# Altium PCB DPT2.0.PcbDoc (part 2 of 2)
Units mm, origin at the board's own origin, x right, y up, seen from the top; angles counter-clockwise.
Board outline 109.22 x 132.08 mm, 4 copper layers (Top Layer, Layer 1, Layer 2, Bottom Layer), stack 1.491 mm thick; 260 components, 74 nets, 572 pads, 330 vias.
Unrouted connection lines stored in the file: 54.
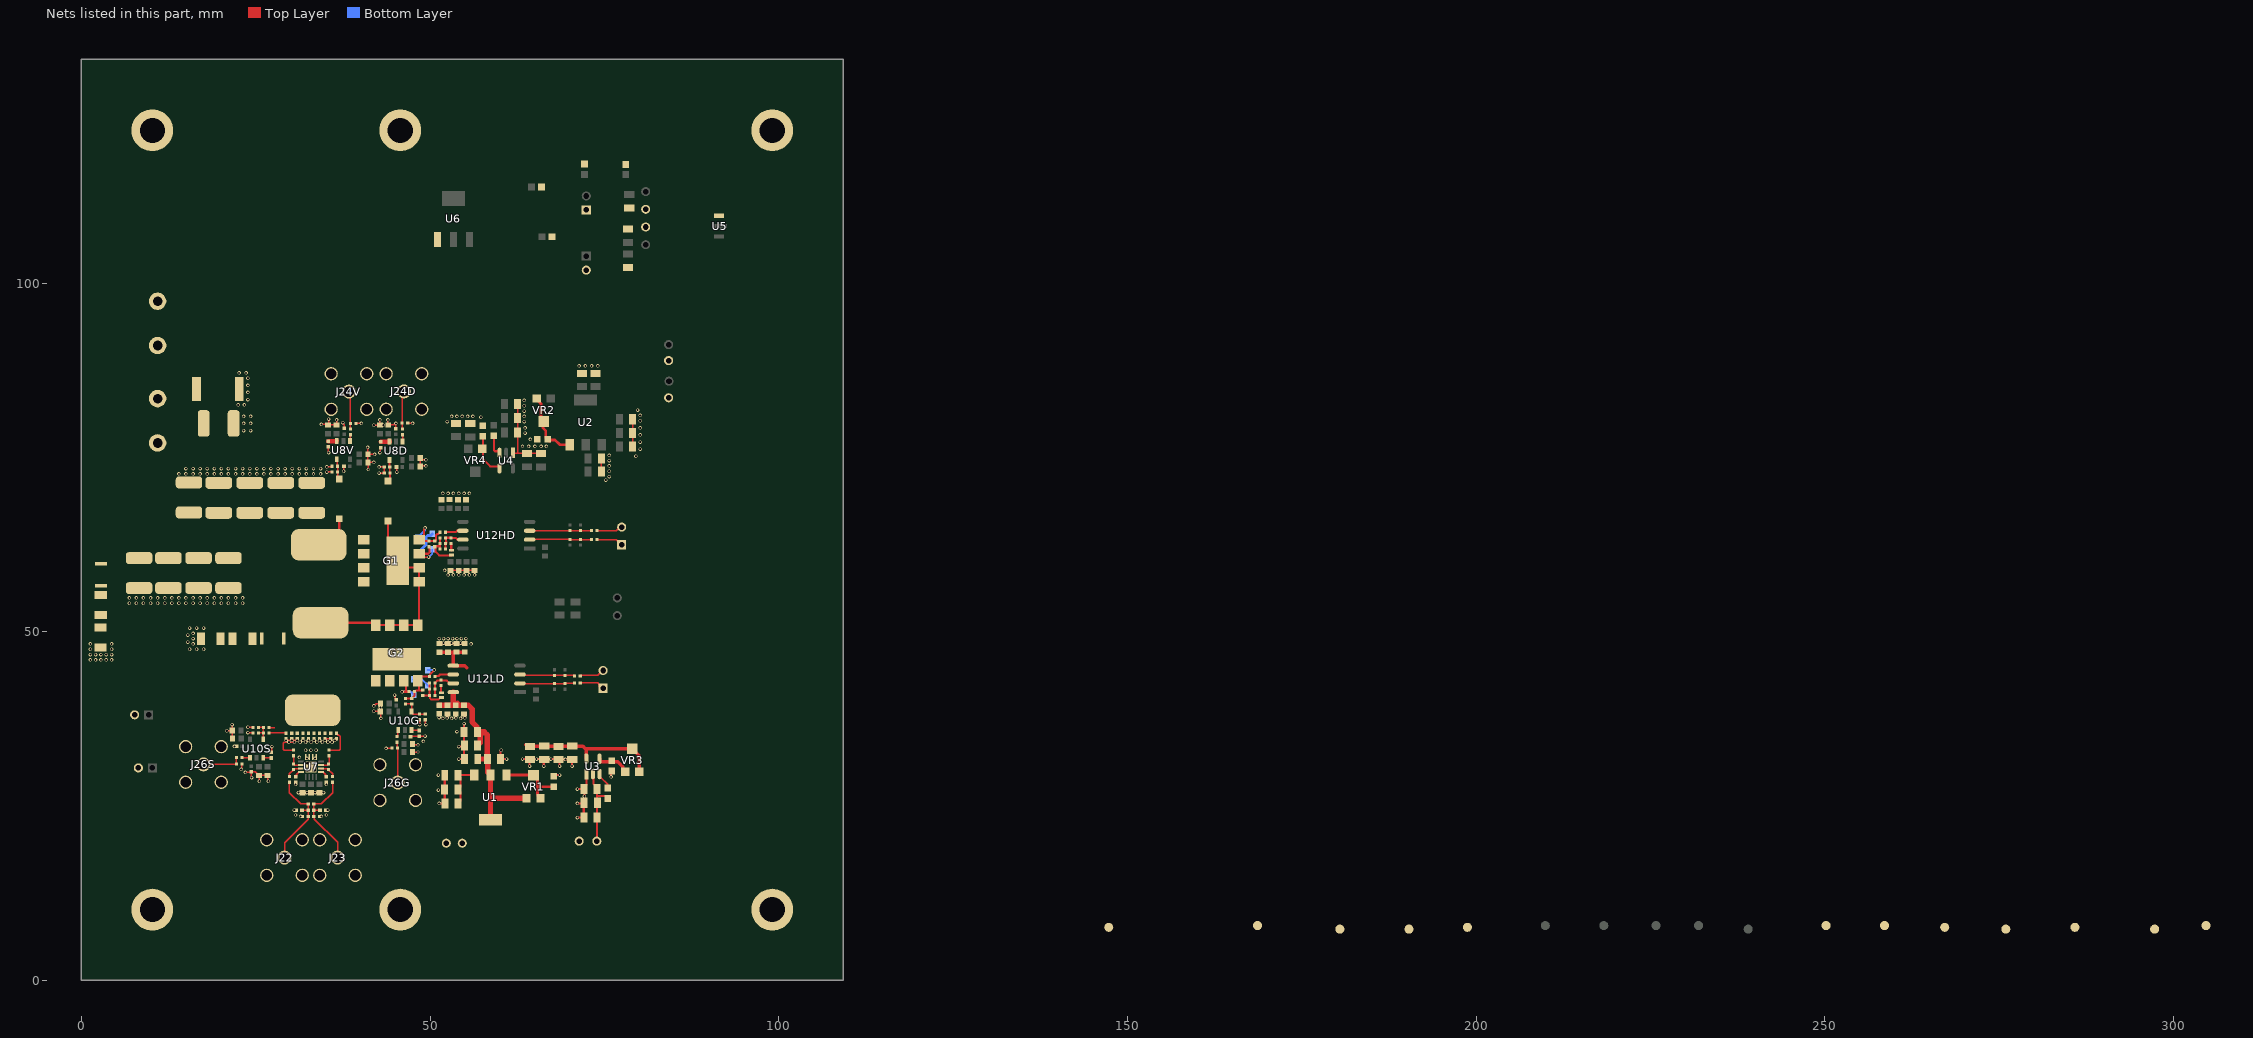
[diagram p4: the nets of this part, all layers, seen from the top]

## Via types
v1: diameter 0.5, hole 0.3, Top Layer to Bottom Layer, 330 vias

## Nets (pads, with @x,y where several pads share a name; then routed paths per layer and width w, separated by ;. In a path a pad name is that pad's centre, name@x,y a point inside that pad or via, vN(x,y) a via of type N, cw(c..) or ccw(c..) an arc to the next point about the centre after c; other vN are vias at no path point) (continued)
H_SS: C13.2 C14.2 C17.2 C18.2 C30.2 C31.2 C32.2 C33.2 C37.2 C38.2 C39.2 C40.2 C44.2 C50.1 C96HD.1 C97HD.1 C98HD.1 C99HD.1 C101HD.2 C102HD.2 C103HD.2 C104HD.2 D2HD.1 G1.3 H_SS.1 J12.1 J16.1 R7.1 R11.1 R68.1 U4.1 | length 26.4
  Top Layer w0.185: G1.3@48.425,61.198 48.917,60.706 v1(49.784,60.706) ; C96HD.1@52.937,58.796 52.941,58.8 54.091,58.8 C97HD.1@54.102,58.811 54.113,58.8 C98HD.1@55.228,58.8 56.374,58.8 C99HD.1@56.384,58.791 ; U4.1@61.859,75.649 61.933,75.575 62.56,75.575 ; C31.2@62.545,82.677 C30.2@62.545,80.645 C50.1@62.545,78.613 C50.1@62.545,78.388 ; C50.1@62.953,77.981 C50.1@62.545,78.388 ; C33.2@65.873,75.56 65.858,75.575 62.56,75.575 ; C18.2@74.546,72.977 C17.2@74.546,74.875 ; C44.2@79.055,76.556 C13.2@79.055,80.493 ; C50.1@62.545,78.388 62.545,75.59 62.56,75.575
  Top Layer w0.3: G1.3@48.425,61.198 49.717,61.198 49.936,61.417 49.936,61.666 49.928,61.674 49.928,62.132 R11.1@49.853,62.207
  Bottom Layer w0.185: v1(49.784,60.706) 50.292,61.214 50.292,61.849 D2HD.1@50.298,61.855
  other v1: 52.578,58.166 53.34,58.166 54.102,58.166 54.864,58.166 55.626,58.166 56.388,58.166 52.07,58.801 51.816,69.85 52.578,69.85 53.34,69.85 54.102,69.85 54.864,69.85 55.626,69.85 75.184,71.755 75.692,72.263 75.692,73.025 75.692,73.787 75.692,74.549 79.502,75.184 75.692,75.311 80.137,76.2 63.246,76.581 64.135,76.581 65.024,76.581 65.913,76.581 66.675,76.581 80.137,77.216 64.389,77.597 80.137,78.232 63.627,78.486 63.627,79.248 80.137,79.248 52.451,80.137 63.5,80.137 80.137,80.264 57.277,80.772 53.086,80.899 53.848,80.899 54.61,80.899 55.372,80.899 56.134,80.899 63.5,80.899 80.137,81.026 63.5,81.661 79.756,81.788 63.5,82.423 63.5,83.185 71.374,88.138 72.263,88.138 73.152,88.138 74.041,88.138
L_+V: "L +V.1" C15.1 C16.1 C22.1 C23.1 C96LD.2 C97LD.2 C98LD.2 C99LD.2 U1.2 U1.4 U12LD.8 VR1.1 | length 33.1
  Top Layer w0.762: C96LD.2@51.308,39.487 51.311,39.484 52.509,39.484 C97LD.2@52.512,39.481 52.514,39.484 C99LD.2@53.678,39.484 ; U12LD.8@53.325,41.34 53.325,39.669 53.492,39.669 C99LD.2@53.678,39.484 ; C99LD.2@53.934,39.735 53.683,39.484 C99LD.2@53.678,39.484 ; C22.1@56.783,35.656 56.664,35.775 56.664,36.427 56.027,37.064 56.027,38.945 55.5,39.471 54.8,39.471 54.793,39.478 53.684,39.478 C99LD.2@53.678,39.484 ; C15.1@56.805,33.706 57.18,34.081 57.18,35.194 57.494,35.508 57.494,35.656 57.746,35.656 58.207,35.195 C23.1@58.207,31.775 ; C16.1@56.83,31.75 56.855,31.775 C23.1@58.207,31.775 ; U1.4@58.649,23.052 58.649,26.196 ; VR1.1@63.82,26.15 58.695,26.15 58.649,26.196 ; C23.1@58.207,31.775 58.256,31.726 58.256,29.845 U1.2@58.649,29.452 58.649,26.196
L_+VIN: C11.1 C12.1 C43.1 J8.1 U1.3 | length 7
  Top Layer w0.25: C43.1@54.013,25.4 54.369,25.756 54.369,27.025 C11.1@53.994,27.4 54.369,27.775 54.369,29.065 C12.1@53.995,29.439 54.009,29.452 U1.3@56.349,29.452
L_-V: "L -V.1" C24.1 C25.1 C28.1 C29.1 C101LD.1 C102LD.1 C103LD.1 C104LD.1 U3.5 U12LD.5 VR3.2 VR3.3 | length 28.3
  Top Layer w0.5: C104LD.1@51.359,47.076 51.366,47.083 53.328,47.083 ; C102LD.1@53.359,47.083 54.957,47.083 C101LD.1@54.964,47.091 ; C102LD.1@53.359,47.114 53.328,47.083 ; 55.245,44.857 54.952,45.15 U12LD.5@53.325,45.15 53.325,47.08 53.328,47.083 ; C25.1@63.74,33.824 64.088,33.824 C25.1@64.338,33.574 64.351,33.587 66.358,33.587 C24.1@66.37,33.599 66.375,33.594 68.407,33.594 C28.1@68.412,33.589 68.418,33.595 70.372,33.595 C29.1@70.378,33.6 70.391,33.587 71.916,33.587 72.253,33.25 ; U3.5@72.398,31.811 72.398,33.105 72.253,33.25 ; VR3.2@79.994,29.95 79.994,32.25 VR3.3@78.994,33.25 72.253,33.25
L_-VIN: C26.1 C27.1 C49.2 J19.1 R13.1 U3.2 | length 11.3
  Top Layer w0.25: U3.2@73.416,29.42 73.411,29.415 73.411,28.995 73.416,28.99 73.416,28.204 73.563,28.057 73.57,28.057 73.945,27.682 73.945,26.448 75.098,26.448 R13.1@75.448,26.098 ; J19.1@73.909,19.985 73.933,20.01 C26.1@73.933,23.378 73.933,25.491 73.933,26.448
L_Gate: D3LD.1 FB1LD.2 G2.4 L_Gate.1 R21.2 R57G.2 R58G.2 R63LD.2 | length 8.9
  Top Layer w0.3: R58G.2@46.493,40.453 46.496,40.456 47.358,40.456 R57G.2@47.36,40.458 47.778,40.876 R21.2@47.778,41.466 47.853,41.541 47.978,41.541 48.029,41.592 48.556,41.592 48.564,41.6 48.871,41.6 FB1LD.2@48.946,41.675 ; 48.413,41.652 48.413,42.814 G2.4@48.212,43.015 48.212,43.055 48.737,43.58 R63LD.2@49.887,43.58 49.962,43.655 49.962,43.882 50.59,44.509 v1(50.59,44.544)
  Bottom Layer w0.3: D3LD.1@49.632,44.509 49.667,44.544 v1(50.59,44.544)
L_SS: C11.2 C12.2 C15.2 C16.2 C22.2 C23.2 C24.2 C25.2 C26.2 C27.2 C28.2 C29.2 C43.2 C49.1 C96LD.1 C97LD.1 C98LD.1 C99LD.1 C101LD.2 C102LD.2 C103LD.2 C104LD.2 D2LD.1 G2.3 J11.1 J15.1 L_SS.1 R6.1 R14.1 R21.1 U3.1 | length 48.5
  Top Layer w0.3: v1(45.974,41.402) 46.914,41.402 R21.1@46.978,41.466 ; G2.3@46.212,43.015 46.529,42.698 46.529,41.466 ; v1@51.289,37.674 v1(51.273,37.69) 51.291,37.707 C96LD.1@51.291,38.22 ; v1(51.308,25.4) C43.2@52.113,25.4 52.095,25.417 C12.2@52.095,29.439 ; C104LD.2@51.359,48.326 51.366,48.333 54.957,48.333 C101LD.2@54.964,48.341 ; v1(52.426,37.658) 52.464,37.696 C97LD.1@52.464,38.183 ; C99LD.1@53.687,38.225 53.687,37.667 v1(53.696,37.658) ; v1(54.102,31.75) C16.2@54.93,31.75 54.883,31.797 C15.2@54.883,33.684 ; v1(54.102,33.528) 54.727,33.528 C15.2@54.883,33.684 ; C98LD.1@54.838,38.221 54.927,38.132 54.927,37.696 v1(54.966,37.658) ; v1(54.864,36.83) 54.864,35.674 C22.2@54.883,35.656 C15.2@54.883,33.706 ; C15.2@54.905,33.706 C15.2@54.883,33.684 ; v1(60.198,33.02) 60.198,32.966 60.107,32.874 C23.2@60.107,31.775 60.132,31.75 v1(60.96,31.75) ; v1(63.246,31.75) v1(65.278,31.75) v1(67.31,31.75) 70.328,31.75 C29.2@70.378,31.7 ; v1(64.262,30.734) 64.262,31.598 C25.2@64.338,31.674 ; v1(66.294,30.734) 66.294,31.623 C24.2@66.37,31.699 ; R6.1@67.701,29.274 67.891,29.464 v1(68.58,29.464) ; v1(68.58,30.734) 68.58,31.521 C28.2@68.412,31.689 68.424,31.7 v1(69.401,31.7) C29.2@70.378,31.7 ; v1(70.358,30.734) 70.358,31.68 C29.2@70.378,31.7 ; v1(71.12,23.368) 72.024,23.368 C26.2@72.033,23.378 C49.1@72.033,25.453 ; v1(71.12,25.4) 71.981,25.4 C49.1@72.033,25.453 ; v1(71.12,27.432) 71.907,27.432 C27.2@72.045,27.57 ; U3.1@72.398,29.61 72.398,28.036 72.045,27.682 C27.2@72.045,27.57 ; v1(75.946,29.21) 75.946,29.948 R14.1@76.032,30.035 ; C49.1@72.033,25.453 C49.1@72.072,25.491 72.136,25.555 v1(72.136,26.416) 72.136,27.366 C27.2@72.045,27.457 C27.2@72.045,27.57
  Bottom Layer w0.3: v1(45.974,41.402) 47.203,41.402 47.325,41.28 47.375,41.28 47.625,41.03 D2LD.1@47.625,40.98
  other v1: 51.181,27.305 51.181,29.464 53.848,35.687 51.816,37.592 53.086,37.592 54.356,37.592 55.88,48.26 51.943,48.387 53.086,48.387 54.356,48.387 51.308,49.022 51.943,49.022 52.578,49.022 53.213,49.022 53.848,49.022 54.483,49.022 55.118,49.022
NetC19_1: C19.1 R4.1
NetC34_2: C34.2 R17.2
NetC59_2: C59.2 U7.9 | length 1.1
  Top Layer w0.25: U7.9@34.367,29.882 34.667,29.882 34.982,29.567 34.982,29.377 C59.2@35.117,29.242
NetC60_2: C60.2 C61.1 J22.1 R37.2 R39.1 R40.2 | length 14.9
  Top Layer w0.185: J22.1@29.117,17.624 29.117,19.719 32.518,23.12 32.518,23.531 32.512,23.537 32.512,24.427 C61.1@32.507,24.432 ; R39.1@29.817,28.432 29.817,26.932 31.422,25.327 R40.2@32.512,25.327 ; C60.2@31.627,24.432 C61.1@32.507,24.432 ; R40.2@32.517,25.332 R40.2@32.512,25.327 ; C61.1@32.507,24.432 32.512,24.437 R40.2@32.512,25.327
NetC61_2: C61.2 C62.1 J23.1 R40.1 R42.1 R43.2 | length 14.9
  Top Layer w0.185: C62.1@34.207,24.432 C61.2@33.327,24.432 ; R42.1@36.017,28.432 36.017,26.932 34.417,25.332 R40.1@33.317,25.332 33.322,25.327 33.322,24.437 C61.2@33.327,24.432 ; J23.1@36.717,17.624 36.717,19.798 33.377,23.138 33.377,23.472 R43.2@33.317,23.532 33.322,23.537 33.322,24.427 C61.2@33.327,24.432
NetC66_2: C66.2 U7.4 | length 1.1
  Top Layer w0.25: C66.2@30.717,29.242 30.852,29.377 30.852,29.567 31.167,29.882 U7.4@31.467,29.882
NetC76D_2: C76D.2 U8D.3 | length 1.3
  Top Layer w0.254: C76D.2@42.901,77.245 C76D.2@42.927,77.271
  Top Layer w0.635: C76D.2@42.927,77.271 U8D.3@44.135,77.271
  Top Layer w0.8: U8D.3@44.135,77.271 U8D.3@44.16,77.296
NetC76V_2: C76V.2 U8V.3 | length 1.2
  Top Layer w0.635: C76V.2@35.408,77.347 35.412,77.351 36.568,77.351 U8V.3@36.612,77.395
NetC89G_1: C89G.1 U10G.3 | length 1.1
  Top Layer w0.185: U10G.3@47.33,35.937 47.414,35.853 C89G.1@48.442,35.853
NetC89S_1: C89S.1 U10S.3 | length 1.2
  Top Layer w0.185: U10S.3@26.069,31.943 26.104,31.908 C89S.1@27.233,31.908
NetD1HD_1: D1HD.1 R62HD.2 | length 1
  Top Layer w0.3: R62HD.2@52.983,62.666 53.032,62.618 53.032,61.75 53.079,61.703 D1HD.1@53.08,61.703
NetD1HD_2: D1HD.2 FB1HD.1 R64HD.2 R67HD.2 R69HD.2 | length 5.6
  Top Layer w0.3: FB1HD.1@50.657,62.206 50.728,62.278 51.409,62.278 ; FB1HD.1@50.79,62.182 50.79,61.478 51.31,60.958 52.125,60.958 52.126,60.959 53.034,60.959 D1HD.2@53.08,61.005 ; R69HD.2@51.407,61.89 51.409,61.892 51.409,62.278 ; R64HD.2@51.418,63.476 51.415,63.472 51.415,62.669 R67HD.2@51.411,62.665 51.409,62.663 51.409,62.278
NetD1LD_1: D1LD.1 R62LD.2 | length 1
  Top Layer w0.3: R62LD.2@51.563,42.281 51.584,42.26 51.584,41.296 D1LD.1@51.605,41.275
NetD1LD_2: D1LD.2 FB1LD.1 R64LD.2 R67LD.2 R69LD.2 | length 5
  Top Layer w0.3: FB1LD.1@48.946,40.875 48.95,40.879 49.887,40.879 R67LD.2@49.891,40.883 49.966,40.808 49.966,40.482 50.142,40.306 51.223,40.306 51.399,40.482 51.399,40.53 51.446,40.577 D1LD.2@51.605,40.577 ; R69LD.2@49.892,41.783 R64LD.2@49.892,42.672 ; R67LD.2@49.9,40.892 R69LD.2@49.9,41.775
NetD2HD_2: D2HD.2 D3HD.2 | length 3.9
  Bottom Layer w0.4: D3HD.2@48.253,61.288 48.253,61.338 49.403,62.488 49.403,63.583 49.637,63.817 50.098,63.817 50.298,64.017 D2HD.2@50.298,64.055
NetD2LD_2: D2LD.2 D3LD.2 | length 2.4
  Bottom Layer w0.3: D2LD.2@47.625,43.18 48.81,43.18 49.632,42.359 D3LD.2@49.632,42.309
NetD3HD_1: D3HD.1 FB1HD.2 G1.4 H_Gate.1 R11.2 R63HD.2 | length 7.9
  Top Layer w0.3: v1(49.276,64.897) 49.276,64.843 49.1,64.667 49.1,63.723 48.575,63.198 G1.4@48.425,63.198 48.624,62.999 48.632,63.007 R11.2@49.853,63.007 ; R11.2@49.928,63.002 49.928,63.007 FB1HD.2@50.656,63.007 ; FB1HD.2@50.657,63.006 50.843,63.193 50.843,63.846 51.048,64.051 51.198,64.051 R63HD.2@51.423,64.276
  Bottom Layer w0.3: D3HD.1@48.253,63.488 48.253,63.538 49.238,64.523 49.238,64.859 v1(49.276,64.897)
NetHSig_1: HSig.1 R1.2 R3.1 R5.2 U12HD.2 | length 8.9
  Top Layer w0.185: U12HD.2@64.265,63.225 64.3,63.26 70.012,63.26 R3.1@70.044,63.228 R1.2@71.544,63.228 R5.2@73.144,63.228
NetJ4_1: J4.1 R5.1 | length 3.8
  Top Layer w0.185: R5.1@73.944,63.228 76.726,63.228 J4.1@77.47,62.484
NetJ4_2: J4.2 R8.1 | length 3.7
  Top Layer w0.185: R8.1@73.944,64.528 76.672,64.528 77.168,65.024 J4.2@77.47,65.024
NetJ14_1: J14.1 R18.1 | length 3.8
  Top Layer w0.185: R18.1@71.52,42.672 74.041,42.672 74.269,42.444 74.269,42.19 74.612,41.846 74.676,41.91 J14.1@74.803,41.91
NetJ14_2: J14.2 R19.1 | length 3.6
  Top Layer w0.185: R19.1@71.52,43.688 71.594,43.762 74.067,43.762 74.755,44.45 J14.2@74.803,44.45
NetJ24D_1: J24D.1 R46D.2 R47D.2 | length 5.5
  Top Layer w0.185: R47D.2@46.025,79.064 46.003,79.086 46.003,79.912 R46D.2@45.98,79.934 45.98,84.207 J24D.1@46.241,84.468
NetJ24V_1: J24V.1 R46V.2 R47V.2 | length 5.5
  Top Layer w0.185: J24V.1@38.354,84.455 38.562,84.247 R46V.2@38.562,79.87 R47V.2@38.562,79.07
NetJ26G_1: J26G.1 R53G.2 R55G.2 | length 5.8
  Top Layer w0.185: R55G.2@45.255,34.166 45.285,34.137 45.285,33.394 R53G.2@45.314,33.364 45.336,33.343 45.336,28.405 J26G.1@45.358,28.383
NetJ26S_1: J26S.1 R53S.2 R55S.2 | length 5.7
  Top Layer w0.185: J26S.1@17.49,30.984 17.527,31.021 22.182,31.021 R53S.2@22.218,31.058 R55S.2@22.219,31.968
NetLSig_1: LSig.1 R15.2 R16.1 R18.2 U12LD.2 | length 7.9
  Top Layer w0.185: U12LD.2@62.886,42.61 62.909,42.587 67.795,42.587 R16.1@67.818,42.564 R15.2@69.342,42.564 69.396,42.618 70.666,42.618 R18.2@70.72,42.672
NetnHSig_1: nHSig.1 R8.2 R9.1 R12.2 U12HD.3 | length 8.9
  Top Layer w0.185: U12HD.3@64.265,64.495 64.298,64.528 R9.1@70.044,64.528 R12.2@71.544,64.528 R8.2@73.144,64.528
NetnLSig_1: nLSig.1 R19.2 R20.1 R24.2 U12LD.3 | length 7.9
  Top Layer w0.185: U12LD.3@62.886,43.88 62.962,43.804 63.729,43.804 ; 63.729,43.803 67.807,43.803 67.849,43.761 R24.2@69.35,43.762 70.646,43.762 R19.2@70.72,43.688
NetR4_2: R4.2 R10.1
NetR6_2: R6.2 U1.1 VR1.2 VR1.3 | length 9.9
  Top Layer w0.4: U1.1@60.949,29.452 64.817,29.452 65.382,28.888 65.382,28.677 65.405,28.654 65.405,27.774 ; VR1.2@65.82,26.15 65.42,26.55 65.42,26.769 65.405,26.784 65.405,27.774 ; R6.2@67.701,27.774 65.405,27.774
NetR7_2: R7.2 U2.1 VR2.2 VR2.3 | length 10.4
  Top Layer w0.4: VR2.2@65.294,83.461 65.218,83.385 65.888,82.715 65.888,80.567 66.161,80.294 VR2.3@66.294,80.161 66.196,80.063 66.196,79.219 66.566,78.849 66.566,77.872 67.013,77.425 67.116,77.322 67.116,77.528 67.916,77.528 68.608,76.835 U2.1@70.014,76.835
NetR13_2: R13.2 U3.3 | length 1.9
  Top Layer w0.25: U3.3@74.458,29.108 75.448,28.118 R13.2@75.448,27.598
NetR14_2: R14.2 U3.4 VR3.1 | length 4.9
  Top Layer w0.5: U3.4@74.298,31.811 74.298,31.415 74.333,31.38 75.877,31.38 R14.2@76.032,31.535 ; R14.2@76.113,31.454 76.179,31.388 76.896,31.388 77.644,30.641 77.644,30.3 VR3.1@77.994,29.95
NetR17_1: R17.1 R22.2
NetR36_1: R36.1 R39.2 U7.3 | length 2.4
  Top Layer w0.185: R39.2@29.817,29.232 29.817,29.632 R36.1@30.417,30.232
  Top Layer w0.25: R36.1@30.417,30.232 30.567,30.382 U7.3@31.467,30.382
NetR36_2: R36.2 R38.1 U7.2 | length 2.3
  Top Layer w0.185: R38.1@30.417,32.232 R36.2@30.417,31.032 30.567,30.882 U7.2@31.467,30.882
NetR41_1: R41.1 R44.2 U7.11 | length 2.4
  Top Layer w0.185: U7.11@34.367,30.882 35.267,30.882 R44.2@35.417,31.032 35.517,31.132 R41.1@35.517,32.232
NetR42_2: R42.2 R44.1 U7.10 | length 2.4
  Top Layer w0.185: R44.1@35.417,30.232 36.017,29.632 R42.2@36.017,29.232
  Top Layer w0.25: U7.10@34.367,30.382 35.267,30.382 R44.1@35.417,30.232
NetR47D_1: R47D.1 U8D.1 | length 1
  Top Layer w0.185: R47D.1@46.025,78.264 46.043,78.246 46.043,77.314 U8D.1@46.06,77.296
NetR47V_1: R47V.1 U8V.1 | length 0.9
  Top Layer w0.185: U8V.1@38.512,77.395 38.537,77.42 38.537,78.245 R47V.1@38.562,78.27
NetR48D_2: R48D.2 R51D.2 R52D.2 U8D.4 | length 3.2
  Top Layer w0.25: R48D.2@43.982,71.601 44.23,71.848 R51D.2@44.23,72.772 44.222,72.78 44.222,73.653 R52D.2@44.215,73.66 44.188,73.687 44.188,74.619 U8D.4@44.16,74.646
NetR48V_2: R48V.2 R51V.2 R52V.2 U8V.4 | length 3
  Top Layer w0.2: U8V.4@36.612,74.745 36.67,74.687 36.67,73.803 R52V.2@36.727,73.745 R51V.2@36.727,72.945 36.727,72.155 R48V.2@36.967,71.915
NetR55G_1: R55G.1 U10G.1 | length 1
  Top Layer w0.185: R55G.1@45.255,34.966 45.343,35.054 45.343,35.849 U10G.1@45.43,35.937
NetR55S_1: R55S.1 U10S.1 | length 1.2
  Top Layer w0.185: R55S.1@23.119,31.968 24.244,31.968 U10S.1@24.269,31.943
NetR57G_1: R57G.1 R58G.1 R60G.2 R61G.2 U10G.4 | length 4.1
  Top Layer w0.185: R58G.1@46.493,39.653 46.496,39.656 47.358,39.656 R57G.1@47.36,39.658 47.345,39.643 U10G.4@47.345,38.622 ; U10G.4@47.33,38.587 47.33,38.437 47.569,38.198 R60G.2@48.498,38.198 48.502,38.195 49.293,38.195 R61G.2@49.297,38.191
NetR57S_1: R57S.1 R58S.1 R60S.2 R61S.2 U10S.4 | length 3.1
  Top Layer w0.185: R61S.2@25.389,36.306 R57S.1@26.097,36.306 26.083,36.292 R58S.1@26.083,35.493 ; R60S.2@25.396,35.501 R60S.2@25.404,35.493 R58S.1@26.083,35.493 ; U10S.4@26.083,34.607 R58S.1@26.083,35.493 ; R58S.1@26.1,35.493 R58S.1@26.083,35.493
NetR62HD_1: R62HD.1 R64HD.1 R67HD.1 R69HD.1 U12HD.7 | length 4.5
  Top Layer w0.3: R69HD.1@52.207,61.89 52.209,61.892 52.209,62.663 R67HD.1@52.352,62.805 ; R67HD.1@52.211,62.665 R67HD.1@52.352,62.805 ; U12HD.7@54.704,63.225 54.653,63.276 53.862,63.276 53.672,63.466 R62HD.1@52.983,63.466 52.961,63.488 52.23,63.488 R64HD.1@52.218,63.476 52.293,63.401 52.293,62.864 R67HD.1@52.352,62.805
NetR62LD_1: R62LD.1 R64LD.1 R67LD.1 R69LD.1 U12LD.7 | length 4.8
  Top Layer w0.3: R67LD.1@50.691,40.883 R69LD.1@50.692,41.783 R64LD.1@50.692,42.672 51.026,43.006 51.488,43.006 R62LD.1@51.563,43.081 51.636,43.008 52.391,43.008 52.788,42.61 U12LD.7@53.325,42.61
NetR63HD_1: R63HD.1 U12HD.6 | length 2.6
  Top Layer w0.3: R63HD.1@52.223,64.276 52.235,64.288 53.671,64.288 53.887,64.504 54.695,64.504 U12HD.6@54.704,64.495
NetR63LD_1: R63LD.1 U12LD.6 | length 2.8
  Top Layer w0.3: R63LD.1@50.687,43.58 50.762,43.655 51.193,43.655 51.417,43.88 U12LD.6@53.325,43.88
NetR66_2: R66.2 U4.3 | length 3.1
  Top Layer w0.3: R66.2@59.131,78.117 59.131,76.073 59.307,75.897 59.832,75.897 59.959,75.77 U4.3@59.959,75.649
NetR68_2: R68.2 U4.4 VR4.1 | length 6.3
  Top Layer w0.3: R68.2@57.538,78.059 57.563,78.033 57.563,76.346 57.556,76.34 57.556,74.778 58.598,73.736 59.832,73.736 59.959,73.609 U4.4@59.959,73.449
PGND: C1.2 C2.2 C3.2 C4.2 C5.2 C6.2 C7.2 C8.2 C9.2 C10.2 C35.2 C36.2 C41.2 C42.1 C45.2 C46.2 C47.1 C48.2 C51.1 C52.1 C53.2 C56.1 C57.1 C58.1 C59.1 C60.1 C62.2 C66.1 C70D.2 C70V.2 C71D.2 C71V.2 C72D.2 C72V.2 C74D.2 C74V.2 C75D.2 C75V.2 C76D.1 C76V.1 C80D.2 C80V.2 C84G.2 C84S.2 C85G.2 C85S.2 C86G.2 C86S.2 C88G.2 C88S.2 C89G.2 C89S.2 C90G.2 C90S.2 C94G.2 C94S.2 J3.1 J3.2 J13.1 J17.1 J22.2 J22.3 J22.4 J22.5 J23.2 J23.3 J23.4 J23.5 J24D.2 J24D.3 J24D.4 J24D.5 J24V.2 J24V.3 J24V.4 J24V.5 J26G.2 J26G.3 J26G.4 J26G.5 J26S.2 J26S.3 J26S.4 J26S.5 MH1.1 MH2.1 MH3.1 MH4.1 MH5.1 MH6.1 R2.2 R10.2 R22.1 R26.1 R27.1 R28.1 R29.1 R30.1 R31.1 R32.1 R33.1 R34.1 R35.1 R37.1 R38.2 R43.1 R46D.1 R46V.1 R51D.1 R51V.1 R52D.1 R52V.1 R53G.1 R53S.1 R60G.1 R60S.1 R61G.1 R61S.1 U5.1 U6.1 U7.13 U7.14 U7.15 U7.16 U7.17 U7.18 U7.19 U7.20 U7.21 | length 56.7
  Top Layer w0.185: v1(20.828,35.814) 21.583,35.814 C85S.2@21.633,35.864 ; v1(21.59,36.703) 21.59,35.907 C85S.2@21.633,35.864 ; C86S.2@21.665,34.674 21.633,34.706 C85S.2@21.633,35.864 ; v1(21.942,33.58) C84S.2@22.232,33.58 ; v1(22.915,30.286) 22.915,30.371 23.018,30.474 R53S.1@23.018,31.058 ; v1(23.495,29.845) 23.535,29.885 24.307,29.885 C88S.2@24.348,29.926 ; v1(23.876,35.56) 23.909,35.527 24.57,35.527 R60S.1@24.604,35.493 ; v1(23.876,36.322) 23.884,36.314 24.581,36.314 R61S.1@24.589,36.306 ; v1(24.384,29.083) 24.366,29.101 24.366,29.908 C88S.2@24.348,29.926 ; v1(25.527,28.575) 25.527,29.335 C94S.2@25.455,29.407 ; v1(26.797,28.575) 26.797,28.66 26.68,28.777 C90S.2@26.68,29.415 25.464,29.415 C94S.2@25.455,29.407 ; C89S.2@27.233,32.728 27.269,32.763 27.269,33.492 v1(27.305,33.528) ; v1(29.349,34.433) 30.417,34.433 ; R38.2@30.417,33.032 29.064,33.032 28.956,33.141 28.956,34.05 29.064,34.158 v1(29.749,34.158) v1@30.417,34.158 ; v1@30.489,34.087 v1@30.417,34.158 ; v1(30.549,34.158) v1@30.417,34.158 ; R29.1@31.13,34.433 v1(30.949,34.433) 30.417,34.433 ; v1(34.417,79.756) 35.245,79.756 C75V.2@35.331,79.67 ; v1(34.925,34.417) 35.058,34.55 35.058,34.649 35.081,34.673 35.734,34.673 R27.1@35.749,34.658 ; v1(35.179,72.898) 35.203,72.922 35.904,72.922 R51V.1@35.927,72.945 ; v1(35.179,73.66) 35.222,73.703 35.885,73.703 R52V.1@35.927,73.745 ; C76V.1@35.408,76.527 35.42,76.514 35.42,75.705 v1(35.433,75.692) ; v1(35.433,80.518) 35.433,79.771 C75V.2@35.331,79.67 ; v1(36.576,80.391) 36.576,79.695 C80V.2@36.601,79.67 C75V.2@35.331,79.67 ; v1(37.465,80.01) 37.465,79.925 37.662,79.728 C74V.2@37.662,79.18 ; v1(37.592,73.025) 37.622,73.055 37.622,73.74 C70V.2@37.652,73.77 ; R46V.1@39.362,79.87 39.369,79.876 40.125,79.876 v1(40.132,79.883) ; v1(41.021,76.454) 41.045,76.43 41.045,75.927 41.087,75.885 C71V.2@41.087,75.47 ; v1(41.148,73.279) 41.148,74.209 C72V.2@41.087,74.27 ; v1(41.91,38.608) 42.828,38.608 C85G.2@42.859,38.576 ; v1(41.91,39.37) 42.257,39.717 C86G.2@42.881,39.717 v1(42.881,39.158) 42.881,38.598 C85G.2@42.859,38.576 ; v1(41.91,74.295) 41.112,74.295 C72V.2@41.087,74.27 ; v1(41.91,79.629) 42.758,79.629 C80D.2@42.799,79.67 ; v1(42.037,75.438) 41.119,75.438 C71V.2@41.087,75.47 ; v1(42.672,73.66) R52D.1@43.415,73.66 43.422,73.653 43.422,72.78 R51D.1@43.43,72.772 ; v1(42.672,72.771) R51D.1@43.429,72.772 ; v1(42.799,75.692) 42.85,75.743 42.85,76.374 C76D.1@42.901,76.425 ; v1(42.799,80.391) C80D.2@42.799,79.67 ; v1(42.926,37.592) 42.926,38.51 C85G.2@42.859,38.576 ; v1(43.307,79.629) 42.84,79.629 C80D.2@42.799,79.67 ; v1(43.688,33.274) 43.733,33.319 44.469,33.319 R53G.1@44.514,33.364 ; v1(43.942,80.391) 43.942,79.721 C75D.2@43.993,79.67 44.787,79.67 45,79.883 v1(45.085,79.883) 45.072,79.87 45.072,79.163 C74D.2@45.06,79.15 ; v1(44.919,40.927) 44.979,40.867 44.979,40.416 C84G.2@45.144,40.251 ; C70D.2@45.183,73.635 45.197,73.62 45.197,72.913 v1(45.212,72.898) ; R46D.1@46.78,79.934 46.806,79.908 47.473,79.908 v1(47.498,79.883) ; C88G.2@47.19,34.962 47.226,34.998 48.406,34.998 C89G.2@48.442,35.033 48.451,35.043 49.267,35.043 v1(49.276,35.052) ; C94G.2@47.488,32.766 v1(48.26,32.766) ; C90G.2@47.488,33.909 47.615,33.782 v1(48.26,33.782) ; R60G.1@48.498,37.398 48.506,37.39 48.506,36.711 v1(48.514,36.703) ; R61G.1@49.297,37.391 49.297,36.894 49.403,36.788 v1(49.403,36.703) ; v1(49.403,73.787) 48.637,73.787 48.58,73.73 C71D.2@48.58,74.905 48.809,74.676 v1(49.403,74.676) ; C88S.2@24.348,29.926 24.886,29.926 25.405,29.407 C94S.2@25.455,29.407 ; v1@30.417,34.158 30.421,34.163 30.421,34.42 30.417,34.424 30.417,34.433 ; C72V.2@41.087,74.27 C71V.2@41.087,75.47
  other v1: 31.417,23.532 34.417,23.532 30.717,23.732 35.117,23.732 30.517,24.432 35.317,24.432 31.117,26.932 32.317,26.932 33.517,26.932 34.717,26.932 30.717,28.132 35.117,28.132 32.317,31.862 33.517,31.862 31.242,32.004 32.131,33.02 32.893,33.02 33.655,33.02 31.349,34.158 32.149,34.158 32.949,34.158 33.749,34.158 34.549,34.158 35.349,34.158 35.941,34.163 49.022,34.29 35.641,34.412 36.322,34.417 30.149,34.433 31.749,34.433 32.549,34.433 33.349,34.433 34.149,34.433 1.27,45.974 2.032,45.974 2.794,45.974 3.556,45.974 4.318,45.974 1.27,46.736 2.032,46.736 2.794,46.736 3.556,46.736 4.318,46.736 1.27,47.498 4.318,47.498 15.494,47.498 16.51,47.498 17.526,47.498 1.27,48.26 4.318,48.26 16.002,48.26 15.24,48.514 16.002,49.022 15.24,49.53 16.002,49.784 15.494,50.546 16.51,50.546 17.526,50.546 6.858,54.102 7.874,54.102 8.89,54.102 9.906,54.102 10.922,54.102 11.938,54.102 12.954,54.102 13.97,54.102 14.986,54.102 16.002,54.102 17.018,54.102 18.034,54.102 19.05,54.102 20.066,54.102 21.082,54.102 22.098,54.102 23.114,54.102 6.858,54.864 7.874,54.864 8.89,54.864 9.906,54.864 10.922,54.864 11.938,54.864 12.954,54.864 13.97,54.864 14.986,54.864 16.002,54.864 17.018,54.864 18.034,54.864 19.05,54.864 20.066,54.864 21.082,54.864 22.098,54.864 23.114,54.864 13.97,72.644 14.986,72.644 16.002,72.644 17.018,72.644 18.034,72.644 19.05,72.644 20.066,72.644 21.082,72.644 22.098,72.644 23.114,72.644 24.13,72.644 25.146,72.644 26.162,72.644 27.178,72.644 28.194,72.644 29.21,72.644 30.226,72.644 31.242,72.644 32.258,72.644 33.274,72.644 34.29,72.644 14.986,73.406 16.002,73.406 17.018,73.406 18.034,73.406 19.05,73.406 20.066,73.406 21.082,73.406 22.098,73.406 23.114,73.406 24.13,73.406 25.146,73.406 26.162,73.406 27.178,73.406 28.194,73.406 29.21,73.406 30.226,73.406 31.242,73.406 32.258,73.406 33.274,73.406 34.29,73.406 23.241,78.867 24.257,78.867 23.241,79.883 24.257,79.883 23.241,80.899 24.257,80.899 22.479,82.55 23.368,82.55 23.876,83.312 23.876,84.328 23.876,85.344 23.876,86.36 22.606,87.122 23.622,87.122
Source: G2.1 G2.2 G2.9 J18.1 R26.2 R27.2 R28.2 R29.2 R30.2 R31.2 R32.2 R33.2 R34.2 R35.2 R41.2 R57S.2 R58S.2 Source.1 | length 7.5
  Top Layer w0.185: R57S.2@26.897,36.255 26.9,36.258 27.704,36.258 27.707,36.262 ; R58S.2@26.9,35.496 R26.2@29.389,35.496
  Top Layer w0.25: R41.2@35.517,33.032 36.956,33.032 37.103,33.179 37.103,35.014 36.908,35.208 36.799,35.208 R35.2@36.549,35.458
SW_NODE: C34.1 G1.1 G1.2 G1.9 G2.5 G2.6 G2.7 G2.8 J6.1 R48D.1 | length 32.1
  Top Layer w0.3: J6.1@34.29,51.308 41.869,51.308 G2.8@42.212,50.965 G2.7@44.212,50.965 G2.6@46.212,50.965 G2.5@48.212,50.965 48.425,51.178 G1.1@48.425,57.198 G1.2@48.425,59.198 46.36,59.198 43.982,61.576 R48D.1@43.982,65.901
VBUS: C1.1 C2.1 C3.1 C4.1 C5.1 C6.1 C7.1 C8.1 C9.1 C10.1 C19.2 G1.5 G1.6 G1.7 G1.8 J1.1 J1.2 J2.1 R2.1 R48V.1 Vdd.1 | length 5.5
  Top Layer w0.3: J2.1@34.036,62.484 34.941,62.484 36.967,64.51 R48V.1@36.967,66.215
pads on no net: U7.1

## Polygon pours and split planes (outlines as drawn)
L_SS on Top Layer "L_SS_L01_P180" (solid, pour order 180): 70.739,28.448 70.739,22.352 72.644,22.352 72.644,28.448
L_SS on Top Layer "L_SS_L01_P179" (solid, pour order 179): 71.247,32.258 71.247,30.353 62.992,30.353 62.992,32.258 63.119,32.258 62.992,32.258 63.119,32.258
PGND on Top Layer "PGND_L01_P178" (solid, pour order 178): 43.307,40.259 43.307,37.211 42.418,37.211 41.529,38.1 41.529,40.005 41.783,40.259 41.529,40.259
VBUS on Top Layer "VBUS_L01_P128" (solid, pour order 128): 0,86.995 17.145,86.995 17.145,80.645 17.78,80.01 17.76,77.876 15.748,76.327 14.097,76.327 11.43,73.66 11.43,67.945 37.465,67.945 41.91,63.5 41.91,56.515 30.48,56.515 27.94,59.055 27.305,59.69 0,59.69
PGND on Top Layer "PGND_L01_P143" (solid, pour order 143): 21.844,77.978 23.876,77.978 24.638,78.74 24.638,87.122 23.876,87.884 21.844,87.884
H_SS on Top Layer "H_SS_L01_P177" (solid, pour order 177): 58.039,79.121 56.642,79.121 56.388,79.375 52.578,79.375 51.943,80.01 51.943,80.899 52.324,81.28 58.039,81.28
NetR4_2 on Top Layer "NETR4_2_L01_P141" (solid, pour order 141): 1.778,53.086 3.81,53.086 3.81,50.038 1.778,50.038
+5_SIG on Top Layer "+5_SIG_L01_P176" (solid, pour order 176): 63.373,62.357 63.373,60.579 64.897,60.579 65.278,60.198 66.929,60.198 67.056,60.325 67.056,61.341 65.913,61.341 64.897,62.357
GND_SIG on Top Layer "GND_SIG_L01_P175" (solid, pour order 175): 63.373,66.929 63.373,65.278 66.167,65.278 66.167,66.167 65.405,66.929
+5_SIG on Top Layer "+5_SIG_L01_P174" (solid, pour order 174): 61.976,41.783 61.976,40.005 63.5,40.005 63.881,39.624 65.532,39.624 65.659,39.751 65.659,40.767 64.516,40.767 63.5,41.783
GND_SIG on Top Layer "GND_SIG_L01_P173" (solid, pour order 173): 61.976,46.482 61.976,44.831 64.77,44.831 64.77,45.72 64.008,46.482
+5_SIG on Top Layer "+5_SIG_L01_P172" (solid, pour order 172): 67.818,52.959 71.628,52.959 71.628,50.927 67.818,50.927
GND_SIG on Top Layer "GND_SIG_L01_P171" (solid, pour order 171): 71.628,53.848 71.628,55.753 67.691,55.753 67.691,53.848
H_SS on Top Layer "H_SS_L01_P169" (solid, pour order 169): 74.676,86.614 70.866,86.614 70.866,88.519 74.676,88.519
H_SS on Top Layer "H_SS_L01_P168" (solid, pour order 168): 51.689,59.309 51.689,58.42 52.324,57.785 56.769,57.785 57.023,58.039 57.023,59.309
H_SS on Top Layer "H_SS_L01_P167" (solid, pour order 167): 55.626,68.58 55.753,68.707 55.753,69.469 56.007,69.723 56.007,70.358 51.689,70.358 51.435,70.104 51.435,69.342 51.181,69.342 51.181,68.58
H_SS on Top Layer "H_SS_L01_P166" (solid, pour order 166): 61.976,83.566 64.008,83.566 64.135,83.439 64.135,78.867 64.77,78.232 65.913,78.232 65.913,76.962 67.056,76.962 67.183,76.835 67.183,75.057 61.976,75.057
H_-VIN on Top Layer "H_-VIN_L01_P165" (solid, pour order 165): 61.214,75.057 61.087,74.93 60.579,74.93 60.579,76.581 59.944,77.216 59.944,78.867 59.69,79.121 58.674,79.121 58.674,83.185 59.182,83.693 61.214,83.693
H_SS on Top Layer "H_SS_L01_P164" (solid, pour order 164): 78.486,81.534 79.121,82.169 80.137,82.169 80.645,81.661 80.645,75.565 79.756,74.676 79.248,74.676 78.486,75.438
H_+VIN on Top Layer "H_+VIN_L01_P163" (solid, pour order 163): 74.041,75.946 76.581,75.946 76.581,75.819 76.708,75.692 77.724,75.692 77.724,81.407 74.041,81.407
H_SS on Top Layer "H_SS_L01_P162" (solid, pour order 162): 74.041,75.692 76.073,75.692 76.2,75.565 76.2,71.882 75.692,71.374 74.93,71.374 74.041,72.263
PGND on Top Layer "PGND_L01_P160" (solid, pour order 160): 35.052,76.835 35.052,75.184 35.814,75.184 35.814,76.835
PGND on Top Layer "PGND_L01_P159" (solid, pour order 159): 37.846,78.994 37.211,78.994 36.957,79.248 34.036,79.248 33.782,79.502 33.782,80.645 33.909,80.772 37.211,80.772 37.211,80.645 37.846,80.01
PGND on Top Layer "PGND_L01_P158" (solid, pour order 158): 41.529,79.248 44.577,79.248 44.577,79.223 45.06,78.74 45.466,78.74 45.466,80.772 45.339,80.899 42.291,80.899 41.529,80.137
PGND on Top Layer "PGND_L01_P157" (solid, pour order 157): 40.64,76.835 40.64,72.898 41.783,72.898 42.291,72.39 43.688,72.39 43.688,76.835
PGND on Top Layer "PGND_L01_P156" (solid, pour order 156): 48.133,75.438 48.133,73.279 49.403,73.279 49.784,73.66 49.784,74.93 49.276,75.438
L_SS on Top Layer "L_SS_L01_P155" (solid, pour order 155): 50.8,38.735 50.8,37.211 52.705,37.211 53.34,36.576 53.34,31.623 54.102,30.861 55.626,30.861 55.626,36.195 55.372,36.449 55.372,38.735
L_SS on Top Layer "L_SS_L01_P154" (solid, pour order 154): 50.8,30.48 50.8,24.511 52.705,24.511 52.705,30.48
L_+VIN on Top Layer "L_+VIN_L01_P153" (solid, pour order 153): 57.15,30.353 57.15,25.654 56.007,24.511 56.007,18.415 55.88,18.288 53.594,18.288 53.34,18.542 53.34,30.353
L_-VIN on Top Layer "L_-VIN_L01_P152" (solid, pour order 152): 73.025,30.353 73.66,30.353 73.66,28.829 74.041,28.448 74.549,28.448 74.549,26.924 74.803,26.67 76.2,26.67 76.2,25.273 75.184,24.257 75.184,19.05 72.898,19.05 72.898,30.226
L_-V on Top Layer "L_-V_L01_P151" (solid, pour order 151): 71.882,33.02 71.882,30.988 72.009,30.861 73.406,30.861 73.533,30.988 73.533,33.02
L_+V on Top Layer "L_+V_L01_P150" (solid, pour order 150): 57.023,30.988 57.658,30.353 57.658,25.654 56.896,24.892 56.896,22.098 64.262,22.098 64.643,22.479 64.643,26.924 64.008,27.559 60.325,27.559 59.436,28.448 59.436,30.48 57.15,32.766 57.023,32.766
H_+V on Top Layer "H_+V_L01_P149" (solid, pour order 149): 73.152,70.104 62.103,70.104 58.547,66.548 58.547,59.563 52.324,59.563 52.197,59.69 52.197,60.579 53.467,60.579 53.848,60.96 53.848,62.23 55.626,62.23 56.261,62.865 56.261,65.278 57.023,66.04 57.023,67.056 62.738,72.771 70.358,72.771 71.374,73.787 71.374,83.566 73.279,83.566 73.152,83.439 73.152,77.724
H_-V on Top Layer "H_-V_L01_P148" (solid, pour order 148): 62.103,72.39 56.769,67.056 56.769,66.04 56.261,65.532 51.943,65.532 51.054,66.421 51.054,68.072 51.181,68.199 55.753,68.199 56.261,68.707 56.261,71.628 55.753,72.136 56.007,72.39
H_-V on Top Layer "H_-V_L01_P147" (solid, pour order 147): 57.277,73.787 56.007,75.057 56.007,76.835 56.515,77.343 56.515,78.486 52.959,78.486 52.959,74.93 55.753,72.136
H_-V on Top Layer "H_-V_L01_P146" (solid, pour order 146): 66.548,74.168 66.548,73.152 62.865,73.152 61.849,72.136 55.753,72.136 55.753,73.787 57.404,73.787 58.547,72.644 60.452,72.644 61.595,73.787 61.595,74.168
H_+V on Top Layer "H_+V_L01_P145" (solid, pour order 145): 70.739,84.201 70.739,82.423 71.755,81.407 71.755,72.009 73.152,72.009 73.152,81.407 73.025,81.534 73.914,82.423 73.914,84.201
H_+V on Top Layer "H_+V_L01_P144" (solid, pour order 144): 66.548,82.55 73.914,82.55 74.93,83.566 74.93,85.725 68.326,85.725 66.548,83.82
PGND on Top Layer "PGND_L01_P142" (solid, pour order 142): 13.462,70.612 35.052,70.612 35.941,71.501 35.941,75.946 35.052,75.946 35.052,74.168 34.798,73.914 25.4,73.914 19.812,73.914 14.224,73.914 13.462,73.152
NetC19_1 on Top Layer "NETC19_1_L01_P140" (solid, pour order 140): 1.778,56.896 1.778,54.61 3.81,54.61 3.81,56.896
PGND on Top Layer "PGND_L01_P139" (solid, pour order 139): 0.762,48.768 4.826,48.768 4.826,45.466 0.762,45.466
NetR17_1 on Top Layer "NETR17_1_L01_P138" (solid, pour order 138): 19.304,50.038 22.352,50.038 22.352,48.006 19.304,48.006
NetC34_2 on Top Layer "NETC34_2_L01_P137" (solid, pour order 137): 26.162,50.038 26.162,48.006 23.876,48.006 23.876,50.038
PGND on Top Layer "PGND_L01_P136" (solid, pour order 136): 18.034,51.054 18.034,46.99 14.986,46.99 14.732,47.244 14.732,50.8 14.986,51.054
PGND on Top Layer "PGND_L01_P135" (solid, pour order 135): 6.35,57.15 23.622,57.15 23.622,53.721 6.35,53.721
L_-V on Top Layer "L_-V_L01_P134" (solid, pour order 134): 80.01,32.766 61.341,32.766 54.356,39.751 54.356,47.498 57.15,47.498 57.15,40.64 61.976,35.814 80.01,35.814
L_+V on Top Layer "L_+V_L01_P133" (solid, pour order 133): 50.8,39.878 50.8,39.116 55.372,39.116 55.626,38.862 55.626,36.703 56.134,36.195 56.134,30.988 58.674,30.988 58.674,35.56 56.642,37.592 56.642,38.862 53.848,41.656 52.578,41.656
L_-V on Top Layer "L_-V_L01_P132" (solid, pour order 132): 50.8,47.498 55.88,47.498 55.88,44.958 51.562,44.958 50.8,45.72
L_SS on Top Layer "L_SS_L01_P131" (solid, pour order 131): 50.8,49.276 50.8,48.006 56.388,48.006 56.388,48.768 55.88,49.276
PGND on Top Layer "PGND_L01_P129" (solid, pour order 129): 31.623,33.528 31.623,32.004 32.004,31.623 33.909,31.623 34.29,32.004 34.29,33.528
PGND on Top Layer "PGND_L01_P127" (solid, pour order 127): 47.879,34.417 46.99,34.417 46.99,32.258 48.387,32.258 49.657,33.528 49.657,35.433 47.879,35.433
Source on Top Layer "SOURCE_L01_P125" (solid, pour order 125): 41.91,47.625 36.83,42.545 28.575,42.545 27.305,41.275 27.305,34.925 38.735,34.925 38.735,37.719 43.053,42.037 48.895,42.037 48.895,47.625
SW_NODE on Top Layer "SW_NODE_L01_P124" (solid, pour order 124): 43.815,64.135 46.99,64.135 46.99,60.325 47.625,59.69 49.53,59.69 49.53,50.165 48.895,49.53 40.005,49.53 38.735,48.26 28.575,48.26 27.94,48.895 27.94,53.34 28.575,53.975 43.815,53.975
PGND on Top Layer "NONET_L-01_P-001" (solid, pour order 64): 29.499,33.908 29.099,34.308 29.099,34.908 36.799,34.908 36.799,34.308 36.399,33.908
+5 on Top Layer "NONET_L-01_P-001" (solid, pour order 58): 34.542,27.782 31.292,27.782 31.292,28.532 32.037,29.277 32.037,29.58 33.797,29.58 33.797,29.277 34.542,28.532
PGND on Top Layer "NONET_L-01_P-001" (solid, pour order 66): 34.717,26.532 31.117,26.532 30.917,26.732 30.917,27.132 31.067,27.282 34.767,27.282 34.917,27.132 34.917,26.732
PGND on Top Layer "NONET_L-01_P-001" (solid, pour order 118): 34.917,24.732 34.817,24.632 34.817,24.132 34.517,23.832 34.217,23.832 34.117,23.732 34.117,23.332 34.217,23.232 35.117,23.232 35.617,23.732 35.617,24.632 35.517,24.732
PGND on Top Layer "NONET_L-01_P-001" (solid, pour order 119): 30.917,24.732 31.017,24.632 31.017,24.132 31.317,23.832 31.617,23.832 31.717,23.732 31.717,23.332 31.617,23.232 30.717,23.232 30.217,23.732 30.217,24.632 30.317,24.732
GND_SIG on Layer 1 "GND_SIG_L02_P170" (solid, pour order 170): 62.865,66.167 64.094,67.396 78.969,67.397 78.969,39.599 78.74,39.37 62.484,39.37 61.722,39.878 61.595,55.245 62.865,56.515
L_SS on Layer 1 "L_SS_L02_P120" (solid, pour order 120): 45.466,39.878 49.784,39.878 50.8,36.195 50.8,18.034 82.169,18.034 85.09,20.955 85.09,34.29 83.185,36.195 61.976,36.195 57.404,40.767 57.404,48.613 56.007,50.165 50.482,50.165 50.482,46.037 48.26,43.815 45.466,43.815
PGND on Layer 1 "NONET_L02_P122" (solid, shelved, pour order 122): 0,0 50.546,0 50.546,36.449 45.974,36.449 46.99,37.465 48.895,39.37 48.895,52.07 45.72,52.07 45.72,53.975 45.72,58.42 50.165,62.865 50.165,73.882 63.401,88.773 94.615,88.773 94.615,120.015 0,120.015
H_SS on Layer 1 "H_SS_L02_P126" (solid, pour order 126): 52.07,59.183 47.625,60.325 47.625,65.885 52.07,70.33
H_SS on Layer 1 "H_SS_L02_P121" (solid, pour order 121): 51.435,68.58 50.8,68.578 50.8,58.924 53.212,56.512 57.657,56.512 58.801,57.657 58.801,66.547 62.102,69.847 76.072,69.847 85.979,79.755 85.979,92.71 62.688,92.71 51.435,80.48
+5_SIG on Bottom Layer "+5_SIG_L04_P130" (solid, pour order 130): 62.865,66.167 64.094,67.396 78.969,67.397 78.969,39.599 78.74,39.37 62.484,39.37 61.722,39.878 61.595,55.245 62.865,56.515

## Other copper
Layer 1:
  pour cut-out: 36.223,74.098 36.223,75.298 37.123,75.298 37.123,74.098
  pour cut-out: 23.648,31.776 22.748,31.776 22.748,32.176 23.648,32.176 23.648,32.576 24.548,32.576 24.548,31.376 23.648,31.376
  pour cut-out: 46.897,34.154 46.897,35.354 47.797,35.354 47.797,34.154
  pour cut-out: 45.648,35.716 45.648,34.816 45.248,34.816 45.248,35.716 44.748,35.716 44.748,36.616 45.948,36.616 45.948,35.716
  pour cut-out: 30.733,32.761 34.933,32.761 34.933,28.661 30.733,28.661
Layer 2:
  pour cut-out: 36.224,74.088 36.224,75.288 37.124,75.288 37.124,74.088
  pour cut-out: 23.657,31.775 22.757,31.775 22.757,32.175 23.657,32.175 23.657,32.575 24.557,32.575 24.557,31.375 23.657,31.375
  pour cut-out: 46.89,34.161 46.89,35.361 47.79,35.361 47.79,34.161
  pour cut-out: 45.648,35.716 45.648,34.816 45.248,34.816 45.248,35.716 44.748,35.716 44.748,36.616 45.948,36.616 45.948,35.716
  pour cut-out: 24.027,34.512 24.027,33.112 22.727,33.112 22.727,34.512
  pour cut-out: 31.177,31.332 32.477,31.332 32.477,29.932 31.177,29.932

## Text inside footprints (layer, text, board x,y; h text height)
C35: Top Overlay "+" at 13.068,31.217 h1.5 r180
C36: Top Overlay "+" at 12.528,38.837 h1.5 r180
C41: Top Overlay "+" at 71.653,106.778 h1.5 r270
C42: Top Overlay "+" at 73.127,107.598 h1.5 r90